# Altium PCB PLCC-RP2350B_ORIGINALPINNING.PcbDoc
Units mm, origin at the board's own origin, x right, y up, seen from the top; angles counter-clockwise.
Board outline 27.94 x 27.94 mm, 4 copper layers (Top Layer, Layer 1, Layer 2, Bottom Layer), stack 0.603 mm thick; 61 components, 74 nets, 351 pads, 94 vias.
Unrouted connection lines stored in the file: 52.
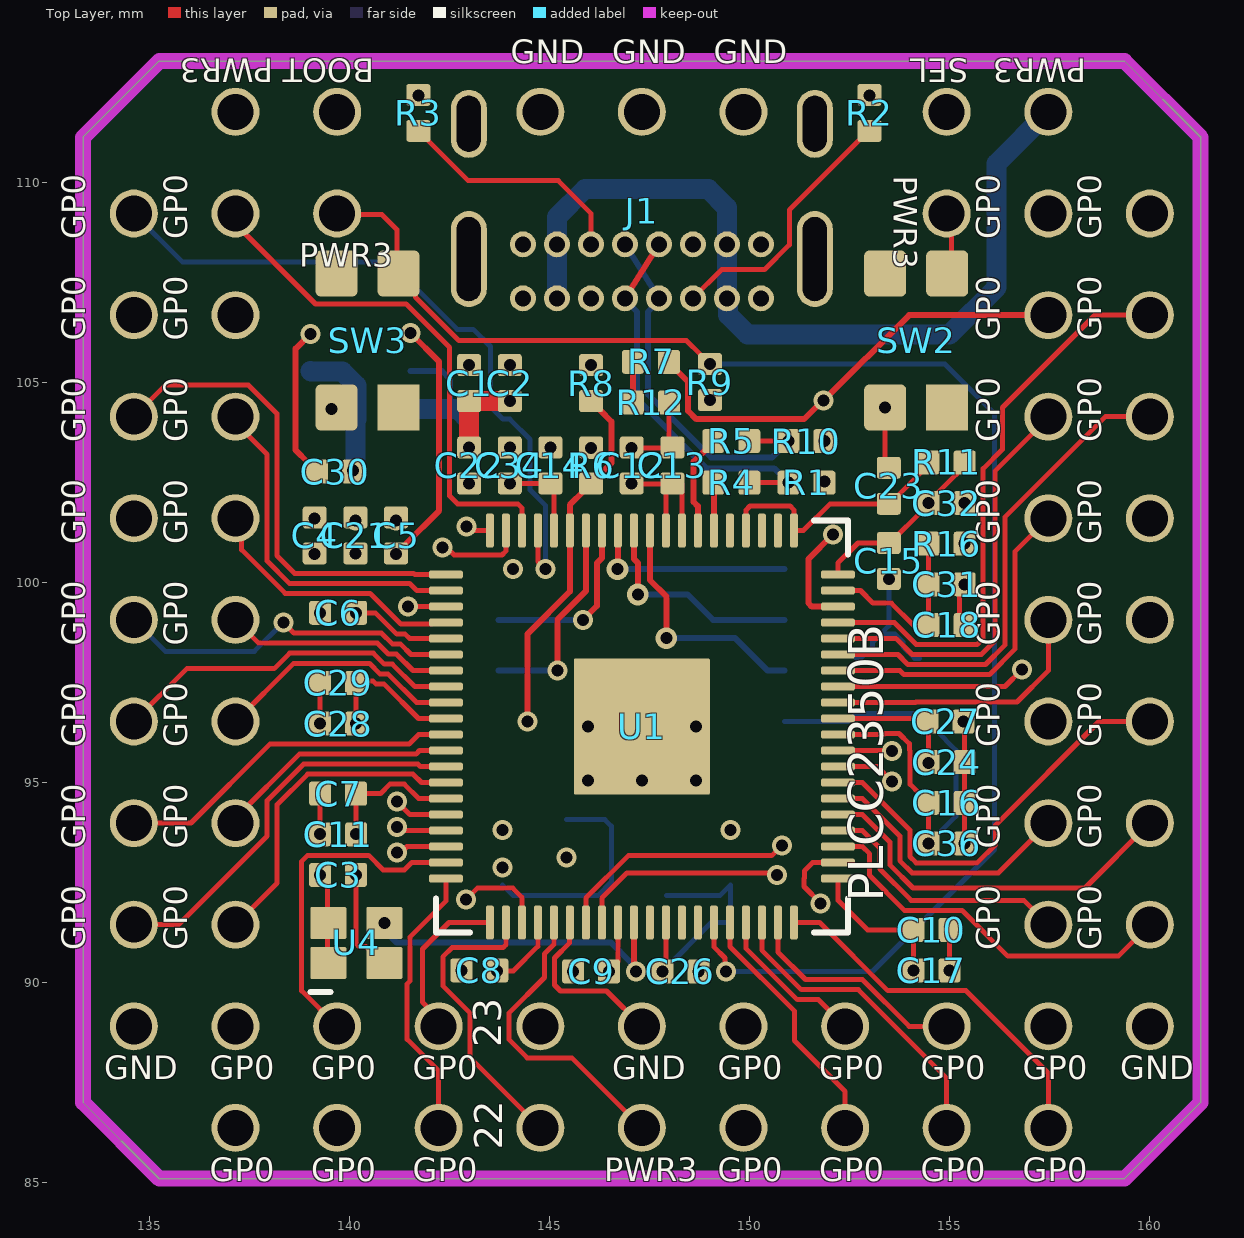
[diagram p0: Top Layer view]
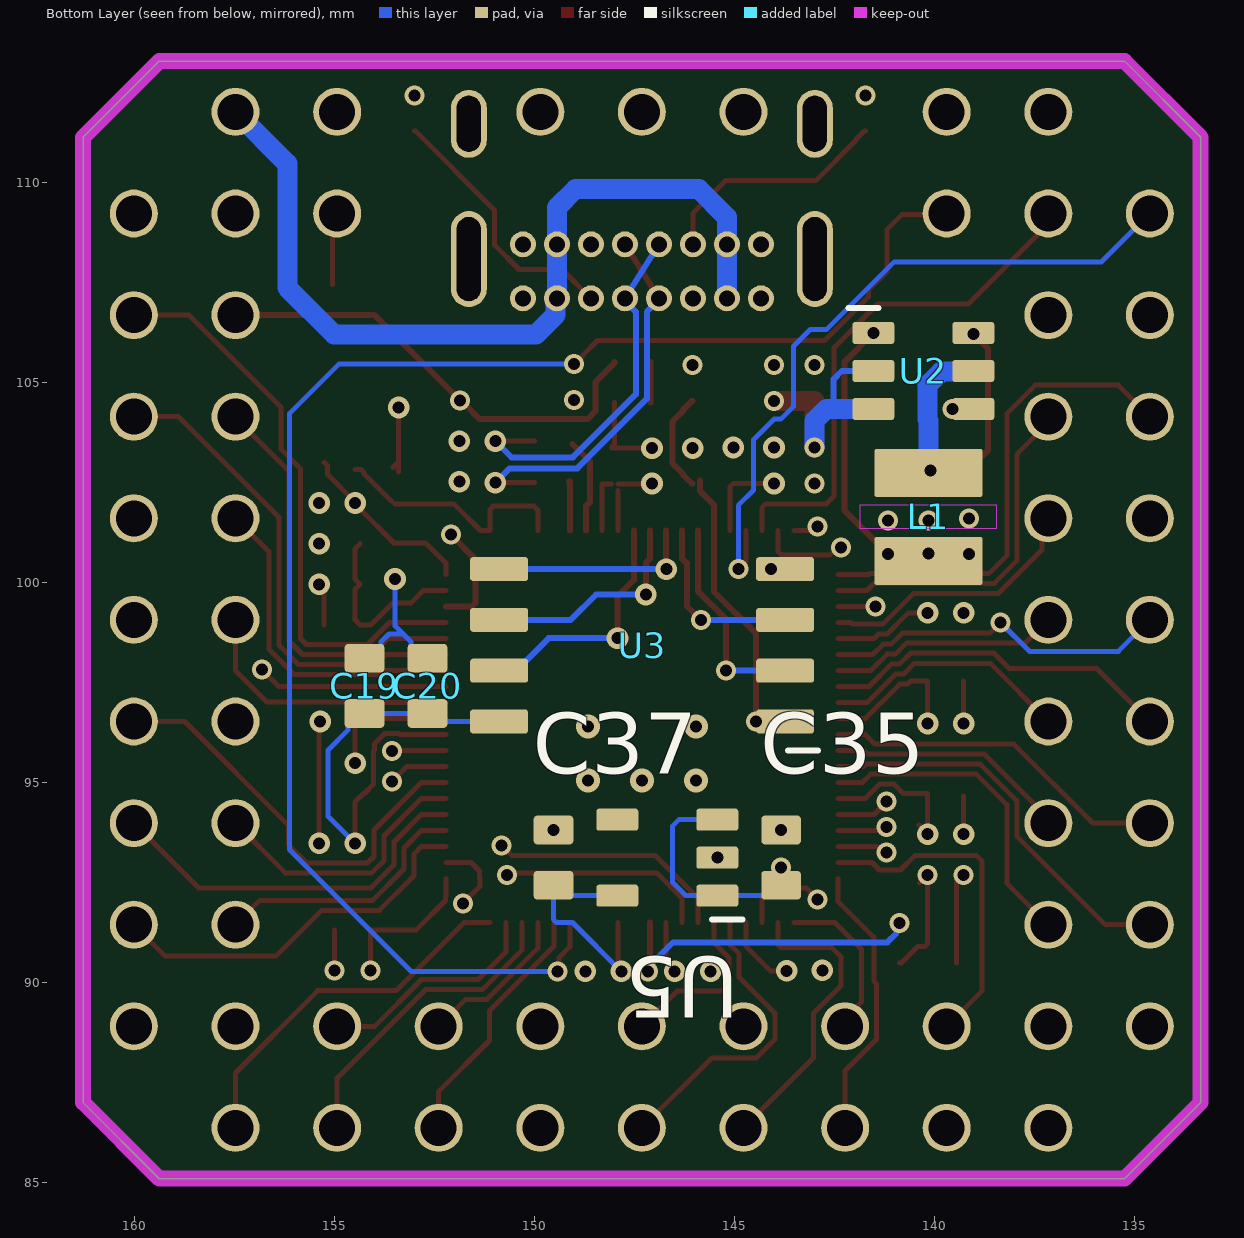
[diagram p1: Bottom Layer view, seen from below]
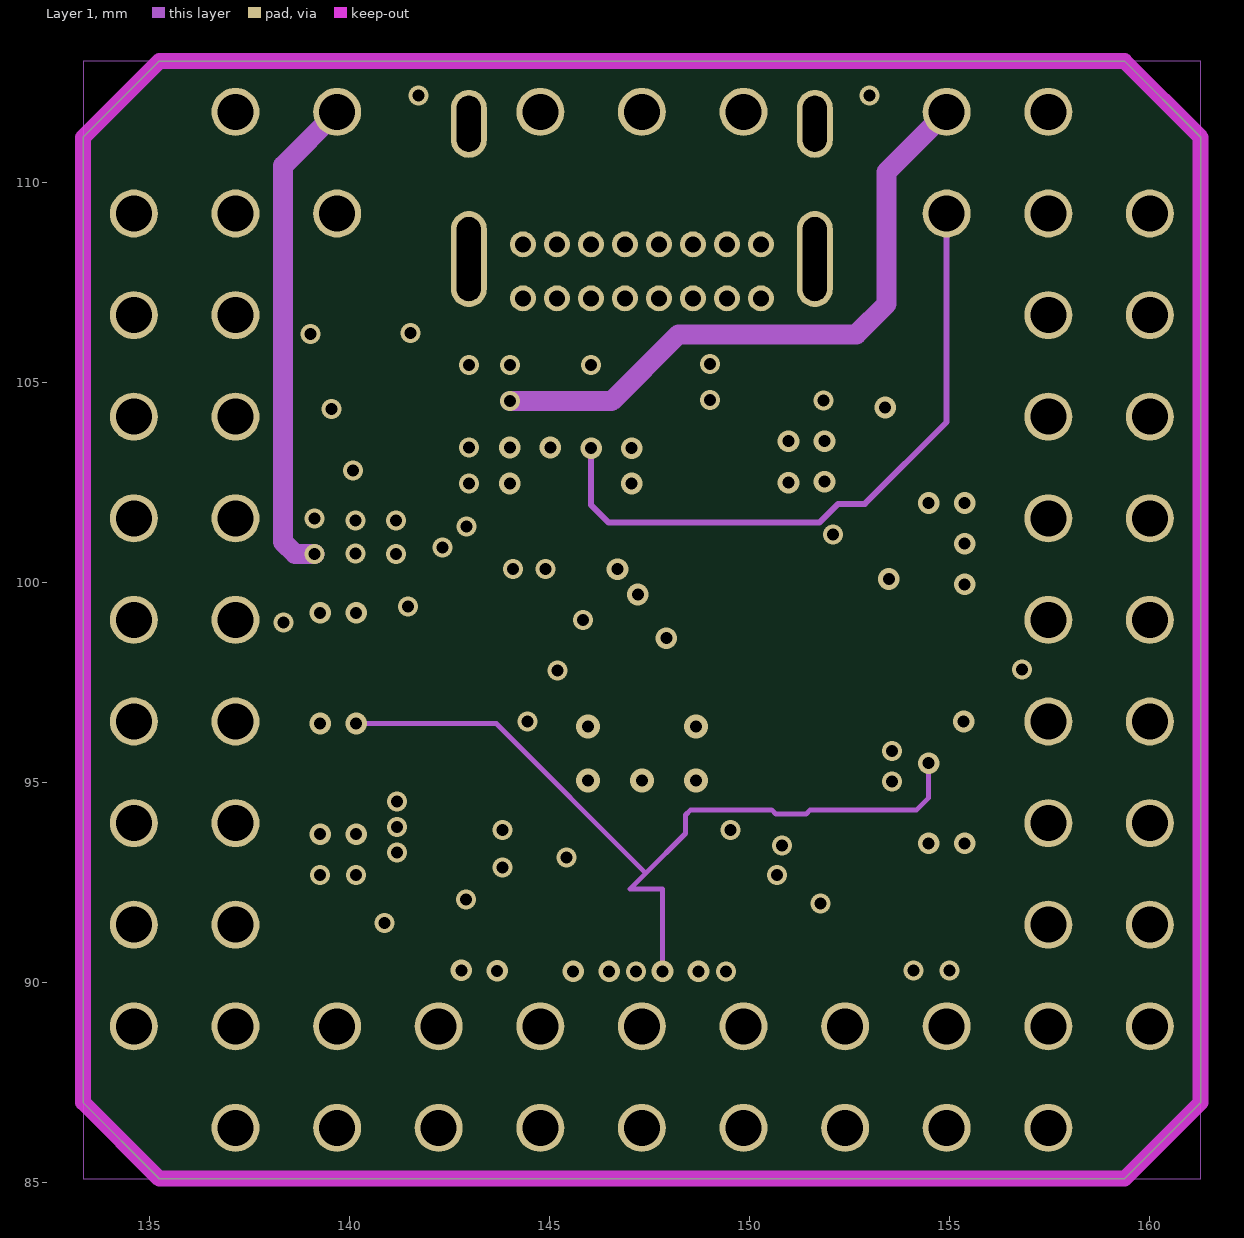
[diagram p2: Layer 1]
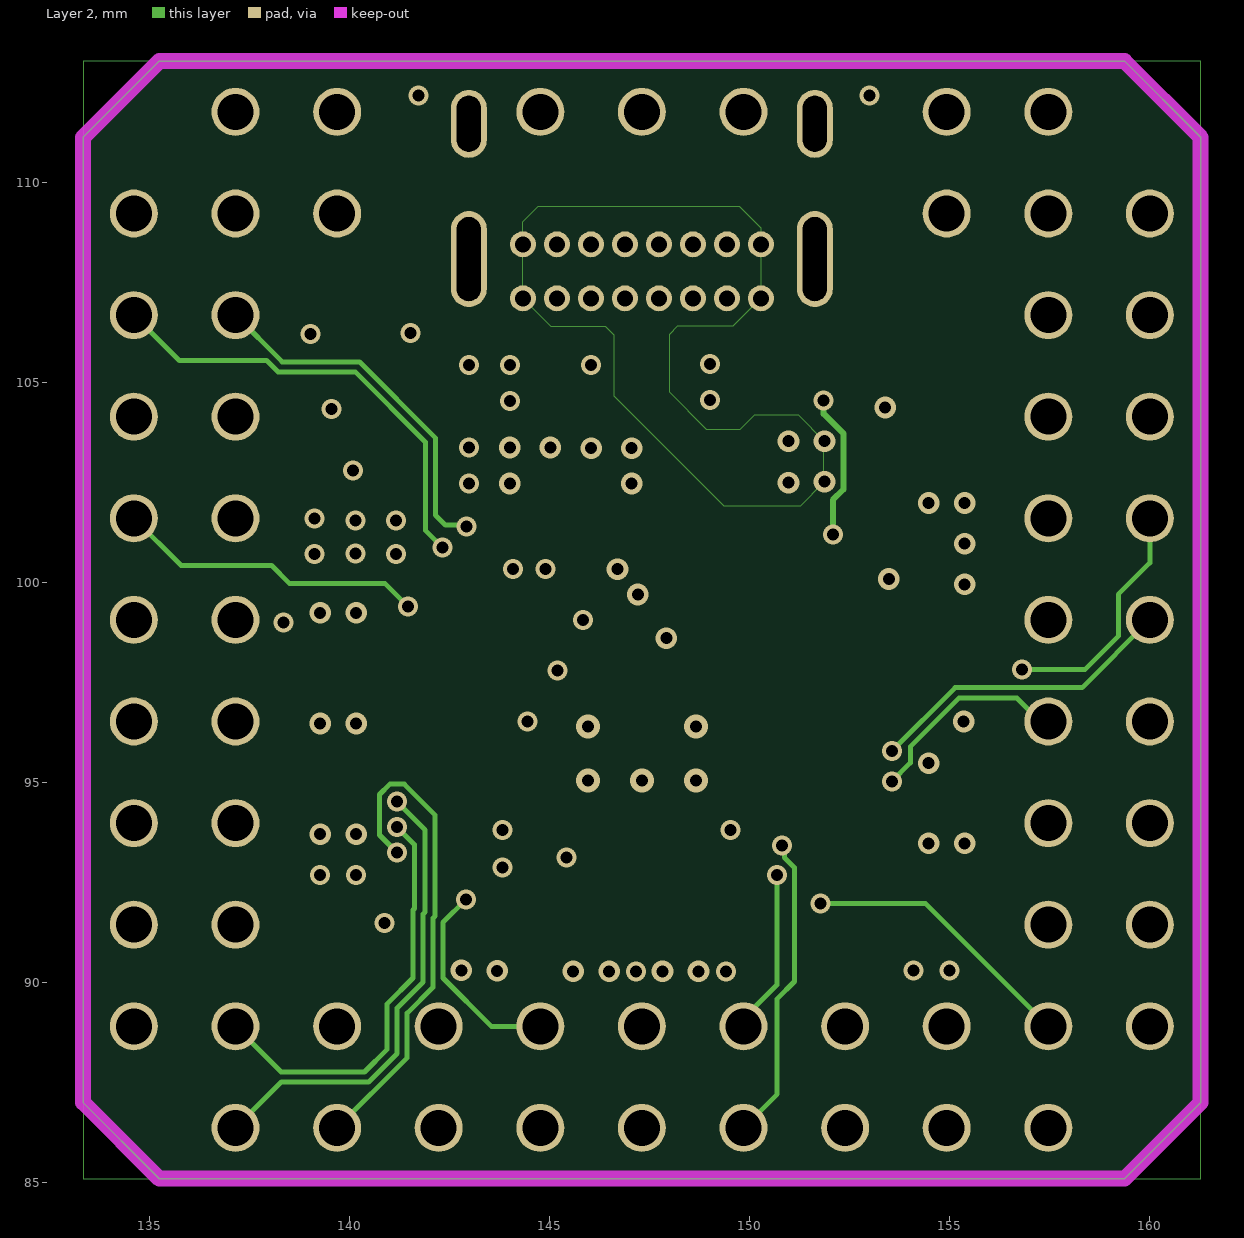
[diagram p3: Layer 2]
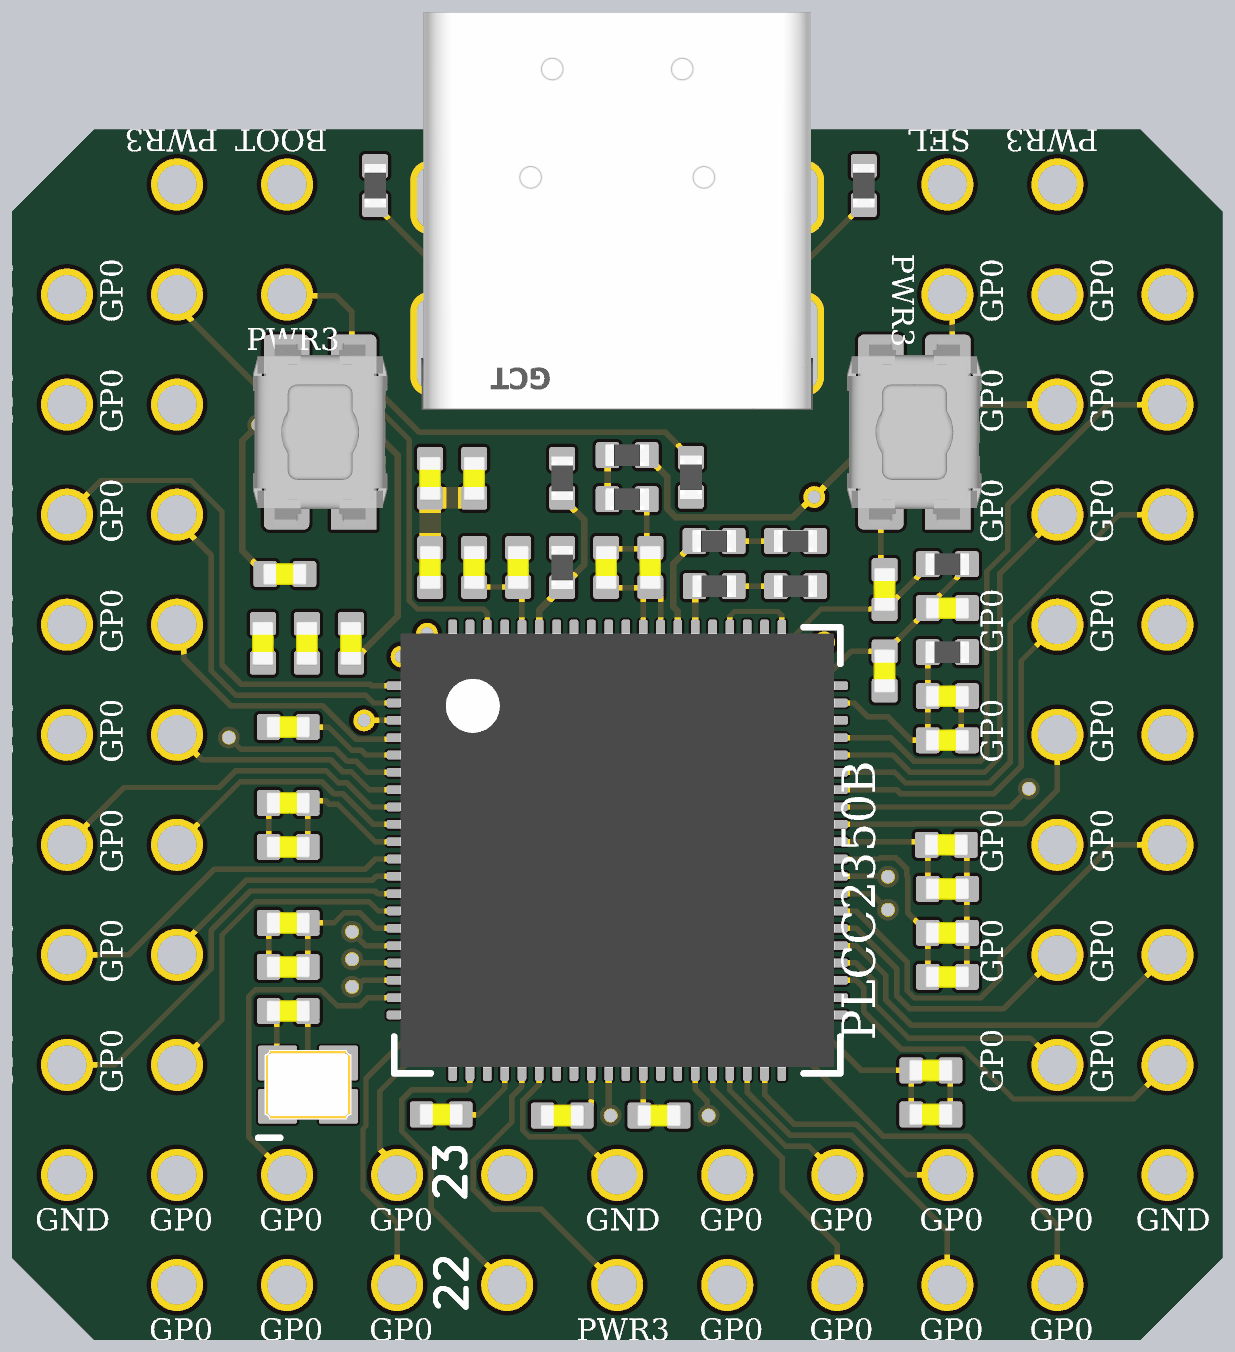
[diagram p4: 3D render of the assembled board from above, using the file's embedded part models]
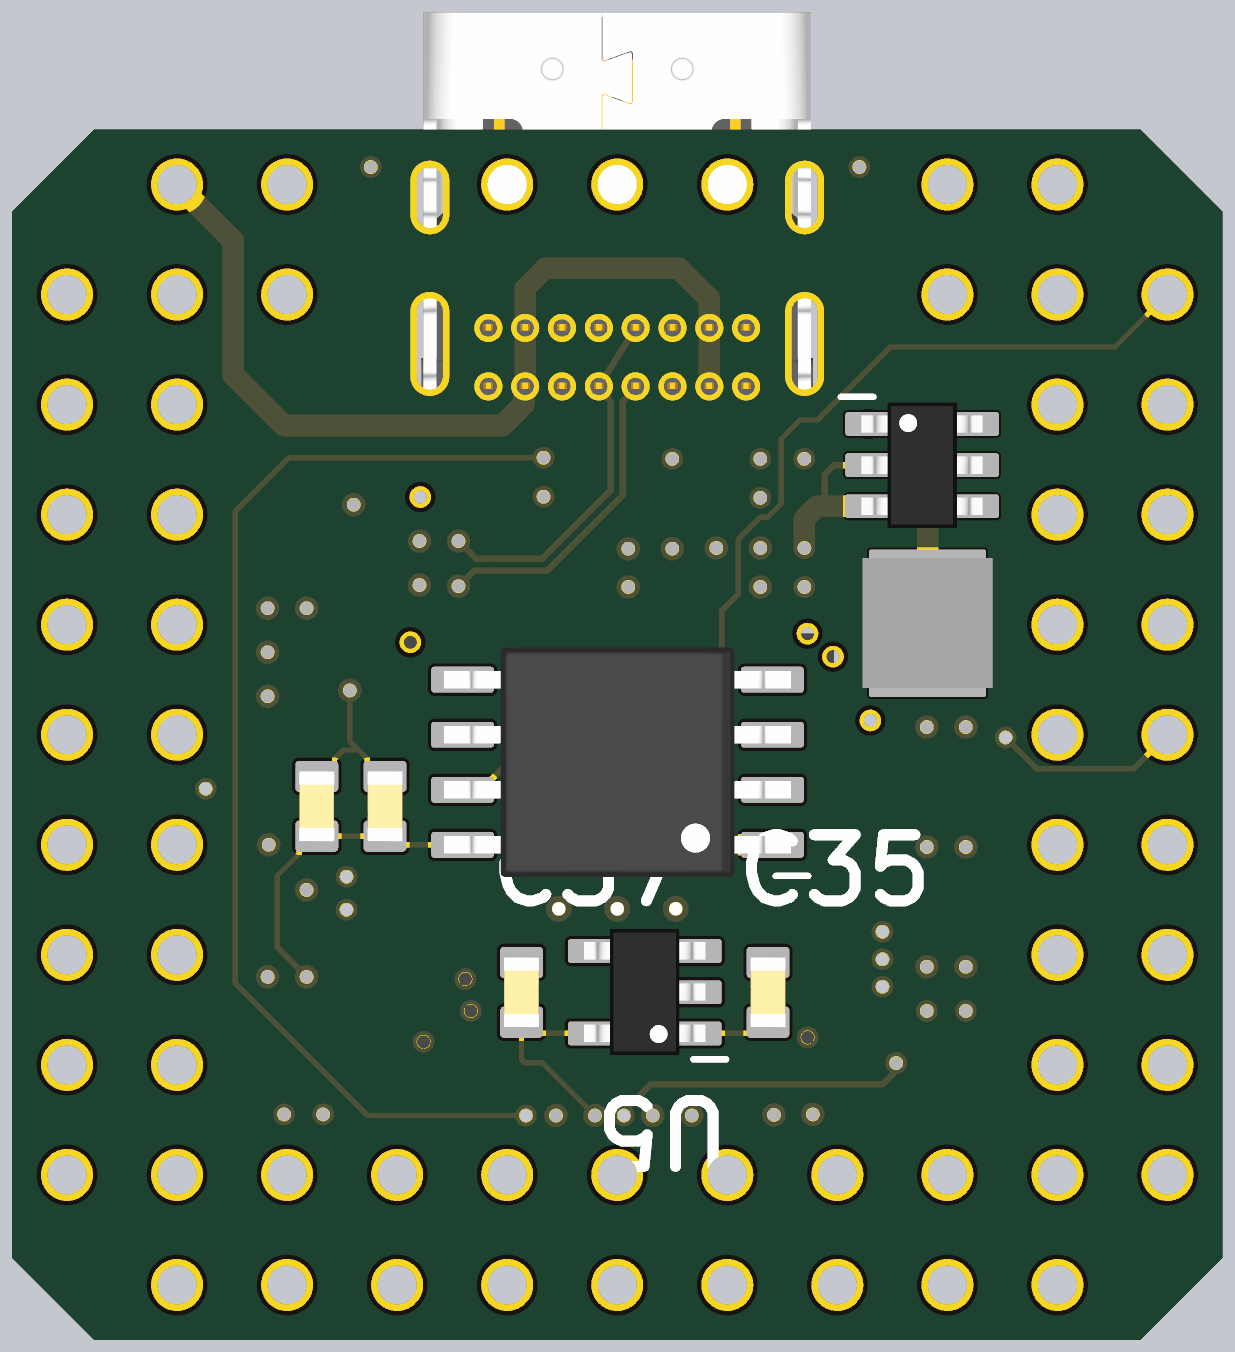
[diagram p5: 3D render of the assembled board from below, using the file's embedded part models]

## Layer stack, top to bottom
Top Solder: solder mask 0.0102, Solder Resist, Dk 3.5
Top Layer: signal copper 0.0356
Dielectric 2: prepreg 0.0711, PP-006, Dk 4.1
Layer 1: signal copper 0.035
Dielectric 1: dielectric 0.32, FR-4, Dk 4.8
Layer 2: signal copper 0.035
Dielectric 3: prepreg 0.0711, PP-006, Dk 4.1
Bottom Layer: signal copper 0.0356
Bottom Solder: solder mask 0.0102, Solder Resist, Dk 3.5

## Board outline
133.35,86.995 135.255,85.09 159.385,85.09 161.29,86.995 161.29,111.125 159.385,113.03 135.255,113.03 133.35,111.125

## Design rules (kind name [scope] priority, off if disabled: settings)
Clearance [All] p1: gap=0.125 ignorepadtopadclearanceinfootprint=FALSE
ComponentClearance [All] p1: gap=0.01 collisioncheckmode=3 verticalgap=0.254 showdistances=FALSE checkcomponentboundary=TRUE
Length "Schematic Length Constraint" [InNetClass('QSPI')] p1: maxlimit=2540 minlimit=0 usedelayunits=TRUE mindelay=0.000000 maxdelay=500.000000
MatchedLengths "Schematic Matched Net Lengths" [InNetClass('QSPI')] p1: tolerance=2 checknetsindiffpair=FALSE checkdiffpairvsdiffpair=TRUE checkxsignals=TRUE checkothers=TRUE usedelayunits=TRUE delaytolerance=50.000000
PolygonConnect [All] p1: thpad.connectstyle=Direct thpad.reliefconductorwidth=0.254 thpad.reliefentries=4 thpad.polygonreliefangle="90 Angle" thpad.airgapwidth=0.254 smdpad.connectstyle=Relief smdpad.reliefconductorwidth=0.254 smdpad.reliefentries=4 smdpad.polygonreliefangle="90 Angle" smdpad.airgapwidth=0.254 via.connectstyle=Direct via.reliefconductorwidth=0.254 via.reliefentries=4 via.polygonreliefangle="90 Angle" via.airgapwidth=0.254
RoutingVias [All] p1: holewidth=0.3 width=0.5 viastyle="Through Hole" minholewidth=0.3 minwidth=0.45 maxholewidth=0.8 maxwidth=1
SolderMaskExpansion [All] p1: expansion=0.102 istentingtop=FALSE
SupplyNets "Schematic Supply Nets_1" [InNet('VSYS')] p1: voltage=0.000
SupplyNets "Schematic Supply Nets_9" [InNet('VREF')] p2: voltage=0.000
SupplyNets "Schematic Supply Nets_8" [InNet('P3V3OUT')] p3: voltage=0.000
SupplyNets "Schematic Supply Nets_7" [InNet('GND')] p4: voltage=0.000
SupplyNets "Schematic Supply Nets_6" [InNet('RST')] p5: voltage=0.000
SupplyNets "Schematic Supply Nets_4" [InNet('VBUS')] p6: voltage=0.000
SupplyNets "Schematic Supply Nets_3" [InNet('P3V3')] p7: voltage=0.000
SupplyNets "Schematic Supply Nets" [InNet('BOOT')] p8: voltage=0.000
Width [All] p1: maxlimit=2 minlimit=0.125 preferedwidth=0.15
29 further rules are at their usual default settings.

## Classes and differential pairs
net class QSPI: QCLK QSD0 QSD1 QSD2 QSD3 QSS

## Components (designator, comment, footprint, x,y, rotation, side; value= is the part's Value field where it differs from the comment)
C1 "CAP0402" CAPC0402 143.002,104.978 r90 top
C2 "CAP0402" CAPC0402 144.018,104.978 r90 top
C3 "CAP0402" CAPC0402 139.725,92.685 r0 top
C4 "CAP0402" CAPC0402 139.141,101.171 r90 top locked
C5 "CAP0402" CAPC0402 141.173,101.171 r90 top locked
C6 "CAP0402" CAPC0402 139.725,99.238 r180 top
C7 "CAP0402" CAPC0402 139.725,94.717 r180 top
C8 "CAP0402" CAPC0402 143.256,90.297 r180 top
C9 "CAP0402" CAPC0402 146.05,90.272 r180 top locked
C10 "CAP0402" CAPC0402 154.559,91.313 r0 top
C11 "CAP0402" CAPC0402 139.725,93.701 r180 top
C12 "CAP0402" CAPC0402 147.066,102.921 r90 top
C13 "CAP0402" CAPC0402 148.082,102.921 r90 top
C14 "CAP0402" CAPC0402 145.034,102.921 r90 top
C15 "CAP0402" CAPC0402 153.492,100.533 r270 top locked
C16 "CAP0402" CAPC0402 154.94,94.488 r0 top
C17 "CAP0402" CAPC0402 154.559,90.297 r0 top
C18 "CAP0402" CAPC0402 154.94,98.933 r0 top locked
C19 "CAP0603" CAPC0603 154.254,97.409 r90 bottom
C20 "CAP0603" CAPC0603 152.679,97.409 r90 bottom
C21 "CAP0402" CAPC0402 140.157,101.171 r90 top locked
C22 "CAP0402" CAPC0402 143.002,102.921 r270 top
C23 "CAP0402" CAPC0402 153.492,102.413 r90 top locked
C24 "CAP0402" CAPC0402 154.94,95.504 r0 top
C26 "CAP0402" CAPC0402 148.285,90.272 r0 top
C27 "CAP0402" CAPC0402 154.915,96.52 r0 top
C28 "CAP0402" CAPC0402 139.725,96.469 r180 top
C29 "CAP0402" CAPC0402 139.725,97.485 r180 top locked
C30 "CAP0402" CAPC0402 139.649,102.768 r180 top
C31 "CAP0402" CAPC0402 154.94,99.949 r0 top locked
C32 "CAP0402" CAPC0402 154.94,101.981 r0 top locked
C34 "CAP0402" CAPC0402 144.018,102.921 r90 top
C35 "CAP0603" CAPC0603 143.84,93.116 r90 bottom
C36 "CAP0402" CAPC0402 154.94,93.472 r0 top
C37 "CAP0603" CAPC0603 149.53,93.116 r90 bottom
D2 "BLUE" LED-0603-BLUE 166.573,87.122 r0 top
J1 "CONN-USBC-USB2-HOR" CONN-GCT-USB4085 147.32,111.125 r180 top locked
J2 "PLCC2350B" PLCC2350B 184.582,100 r0 top
L1 "4.7uH" IND-ABRACON-ASPI-3012S-3R9N-T 140.157,101.635 r270 bottom locked value=4u7H
LOGO1 "LOGO-LICENSE-CC0-PUBLIC" LOGO-LICENSE-CC0-PUBLIC 177.948,131.953 r270 top
LOGO2 "LOGO-LICENSE-CC" LOGO-LICENSE-CC 167.081,127.991 r270 top
R1 "RESC0402" RESC0402 151.435,102.489 r0 top locked value=27R
R2 "RESC0402" RESC0402 153.01,111.735 r90 top value=5K1
R3 "RESC0402" RESC0402 141.732,111.735 r90 top value=5K1
R4 "RESC0402" RESC0402 149.558,102.489 r180 top value=27R
R5 "RESC0402" RESC0402 149.555,103.53 r180 top locked value=27R
R6 "RESC0402" RESC0402 146.05,102.921 r270 top value=1K
R7 "RESC0402" RESC0402 147.549,105.512 r180 top value=1K
R8 "RESC0402" RESC0402 146.05,104.978 r90 top value=10K
R9 "RESC0402" RESC0402 149.022,105.004 r270 top value=10K
R10 "RESC0402" RESC0402 151.435,103.53 r0 top locked value=27R
R11 "RESC0402" RESC0402 154.94,102.997 r180 top locked value=33R
R12 "RESC0402" RESC0402 147.549,104.496 r0 top value=1K
R16 "RESC0402" RESC0402 154.94,100.965 r0 top locked value=33R
SW2 "SWITCH-PANASONIC-EVP-AA202K" SWITCH-PANASONIC-EVP-AA202K 154.178,106.045 r90 top locked
SW3 "SWITCH-PANASONIC-EVP-AA202K" SWITCH-PANASONIC-EVP-AA202K 140.462,106.045 r90 top locked
U1 "IC-RP2350-DIP64" QFN40P1000X1000X90_HS-81N 147.32,96.393 r0 top locked
U2 "AP63203Q" SOT23-6 140.284,105.283 r180 bottom
U3 "W25Q128JVSIQ" SO127P790-8N 147.314,98.425 r0 bottom locked
U4 "XTAL-OSC" XOSC-SCTF-SX1M12.000M10F30TNN 140.183,90.983 r0 top
U5 "IC-TI-TLV74311" SOT23-5 146.685,93.116 r0 bottom

## Footprints (in the part's own frame and the unit in brackets; to place one, negate y for a bottom-side part, rotate by r counter-clockwise, add the part's x,y. Pads: shape width x height; smd on the part's side, far side on the other; paste and mask are expansions set on the pad)
CAPC0402 [mm] "CAPACITOR, CHIP 0402 (1005) 0.5MM THICK"
  rrect25% 0.55x0.6 smd paste+0 mask+0.075: 1(-0.45,0) 2(0.45,0)
  body extent -0.51,-0.25 0.51,0.26, height 0.52
CAPC0603 [mm] "CAPACITOR, CHIP 0603 (1608) 0.5MM THICK"
  rrect25% 0.72x0.99 smd paste+0 mask+0.075: 1(-0.69,0) 2(0.69,0)
  body extent -0.81,-0.41 0.81,0.41, height 0.51
CONN-GCT-USB4085 [mm]
  rrect100% 0.9x2.4 hole 2.1 slot 0.6 at 0 deg paste-2539.97 mask+0: 1(-4.325,3.045) 2(4.325,3.045)
  rrect100% 0.9x1.7 hole 1.4 slot 0.6 at 0 deg paste-2539.97 mask+0: 3(-4.325,-0.335) 4(4.325,-0.335)
  round 0.65 hole 0.4 paste-2539.97 mask+0: A1(-2.975,4.025) A4(-2.125,4.025) A5(-1.275,4.025) A6(-0.425,4.025) A7(0.425,4.025) A8(1.275,4.025) A9(2.125,4.025) A12(2.975,4.025) B1(2.975,2.675) B4(2.125,2.675) B5(1.275,2.675) B6(0.425,2.675) B7(-0.425,2.675) B8(-1.275,2.675) B9(-2.125,2.675) B12(-2.975,2.675)
  body extent -4.87,-4.83 4.87,4.83, height 0.25
IND-ABRACON-ASPI-3012S-3R9N-T [mm]
  rrect8% 1.2x2.7 smd mask+0.05: 1(-1.1,0) 2(1.1,0)
  Top Layer keep-out region: -0.3,1.7 0.3,1.7 0.3,-1.7 -0.3,-1.7
  body extent -1.5,-1.5 1.5,1.5, height 1.51
LED-0603-BLUE [mm]
  rrect12% 0.8x0.8 smd paste+0 mask+0.05: 1(0.75,0) 2(-0.75,0)
  silkscreen extent 1.4,-0.4 1.4,0.4, body extent -0.8,-0.4 0.8,0.4, height 0.9
LOGO-LICENSE-CC [mm]
  silkscreen extent -2.08,-2.05 2.03,2.05
LOGO-LICENSE-CC0-PUBLIC [mm]
  silkscreen extent -1.97,-1.97 10.7,1.97
PLCC2350B [mm]
  round 1.2 hole 0.9: 1(0,-12.7) 2(0,-10.16) 3(2.54,-12.7) 4(2.54,-10.16) 5(5.08,-12.7) 6(5.08,-10.16) 7(7.62,-12.7) 8(7.62,-10.16) 9(10.16,-12.7) 10(12.7,-10.16) 11(10.16,-10.16) 12(12.7,-7.62) 13(10.16,-7.62) 14(12.7,-5.08) 15(10.16,-5.08) 16(12.7,-2.54) 17(10.16,-2.54) 18(12.7,0) 19(10.16,0) 20(12.7,2.54) 21(10.16,2.54) 22(12.7,5.08) 23(10.16,5.08) 24(12.7,7.62) 25(10.16,7.62) 26(12.7,10.16) 27(10.16,12.7) 28(10.16,10.16) 29(7.62,12.7) 30(7.62,10.16) 41(-7.62,12.7) 42(-7.62,10.16) 43(-10.16,12.7) 44(-12.7,10.16) 45(-10.16,10.16) 46(-12.7,7.62) 47(-10.16,7.62) 48(-12.7,5.08) 49(-10.16,5.08) 50(-12.7,2.54) 51(-10.16,2.54) 52(-12.7,0) 53(-10.16,0) 54(-10.16,-2.54) 55(-12.7,-2.54) 56(-12.7,-5.08) 57(-10.16,-5.08) 58(-12.7,-7.62) 59(-10.16,-7.62) 60(-12.7,-10.16) 61(-10.16,-12.7) 62(-10.16,-10.16) 63(-7.62,-12.7) 64(-7.62,-10.16) 65(-5.08,-12.7) 66(-5.08,-10.16) 67(-2.54,-12.7) 68(-2.54,-10.16)
QFN40P1000X1000X90_HS-81N [mm] "QFN, 80-Leads, Body 10.00x10.00mm, Pitch 0.40mm, Thermal Pad 3.40x3.40mm, IPC Medium Density"
  rrect50% 0.85x0.2 smd mask+0.05: 1(-4.9,3.8) 2(-4.9,3.4) 3(-4.9,3) 4(-4.9,2.6) 5(-4.9,2.2) 6(-4.9,1.8) 7(-4.9,1.4) 8(-4.9,1) 9(-4.9,0.6) 10(-4.9,0.2) 11(-4.9,-0.2) 12(-4.9,-0.6) 13(-4.9,-1) 14(-4.9,-1.4) 15(-4.9,-1.8) 16(-4.9,-2.2) 17(-4.9,-2.6) 18(-4.9,-3) 19(-4.9,-3.4) 20(-4.9,-3.8) 41(4.9,-3.8) 42(4.9,-3.4) 43(4.9,-3) 44(4.9,-2.6) 45(4.9,-2.2) 46(4.9,-1.8) 47(4.9,-1.4) 48(4.9,-1) 49(4.9,-0.6) 50(4.9,-0.2) 51(4.9,0.2) 52(4.9,0.6) 53(4.9,1) 54(4.9,1.4) 55(4.9,1.8) 56(4.9,2.2) 57(4.9,2.6) 58(4.9,3) 59(4.9,3.4) 60(4.9,3.8)
  rrect50% 0.2x0.85 smd mask+0.05: 21(-3.8,-4.9) 22(-3.4,-4.9) 23(-3,-4.9) 24(-2.6,-4.9) 25(-2.2,-4.9) 26(-1.8,-4.9) 27(-1.4,-4.9) 28(-1,-4.9) 29(-0.6,-4.9) 30(-0.2,-4.9) 31(0.2,-4.9) 32(0.6,-4.9) 33(1,-4.9) 34(1.4,-4.9) 35(1.8,-4.9) 36(2.2,-4.9) 37(2.6,-4.9) 38(3,-4.9) 39(3.4,-4.9) 40(3.8,-4.9) 61(3.8,4.9) 62(3.4,4.9) 63(3,4.9) 64(2.6,4.9) 65(2.2,4.9) 66(1.8,4.9) 67(1.4,4.9) 68(1,4.9) 69(0.6,4.9) 70(0.2,4.9) 71(-0.2,4.9) 72(-0.6,4.9) 73(-1,4.9) 74(-1.4,4.9) 75(-1.8,4.9) 76(-2.2,4.9) 77(-2.6,4.9) 78(-3,4.9) 79(-3.4,4.9) 80(-3.8,4.9)
  rrect2% 3.4x3.4 smd paste-5 mask+0.05: 81(0,0)
  silkscreen extent -5.15,-5.15 5.15,5.15, body extent -5.01,-5.01 5.01,5.01, height 0.9
RESC0402 [mm] "RESISTOR, CHIP 0402 (1005)"
  rrect25% 0.55x0.6 smd paste+0 mask+0.075: 1(-0.45,0) 2(0.45,0)
  body extent -0.5,-0.25 0.5,0.25, height 0.27
SO127P790-8N [mm] "SO8"
  rrect25% 1.45x0.6 smd mask+0.075: 1(-3.575,1.905) 2(-3.575,0.635) 3(-3.575,-0.635) 4(-3.575,-1.905) 5(3.575,-1.905) 6(3.575,-0.635) 7(3.575,0.635) 8(3.575,1.905)
  silkscreen extent -4.4,2.62 -3.65,2.63, body extent -4,-2.65 4,2.65, height 2.16
SOT23-5 [mm] "SOT23 PACKAGE, 5 PIN (SOT25)"
  rrect25% 1.05x0.55 smd paste+0 mask+0.075: 1(-1.25,0.95) 2(-1.25,0) 3(-1.25,-0.95) 4(1.25,-0.95) 5(1.25,0.95)
  silkscreen extent -1.87,1.55 -1.12,1.55, body extent -1.4,-1.46 1.4,1.44, height 1.45
SOT23-6 [mm] "SOT23 PACKAGE, 6 PIN (SOT26)"
  rrect25% 1.05x0.55 smd paste+0 mask+0.05: 1(-1.25,0.95) 2(-1.25,0) 3(-1.25,-0.95) 4(1.25,-0.95) 5(1.25,0) 6(1.25,0.95)
  silkscreen extent -1.88,1.58 -1.12,1.58, body extent -1.4,-1.45 1.4,1.45, height 1.45
SWITCH-PANASONIC-EVP-AA202K [mm] "SWITCH-PANASONIC-EVP-AA202K"
  rect 1.15x1.05 smd mask+0.075: 1(-1.675,-0.775)
  rrect25% 1.15x1.05 smd mask+0.075: 2(1.675,-0.775) 3(1.675,0.775) 4(-1.675,0.775)
  body extent -2.15,-1.55 2.15,1.55, height 1.71
XOSC-SCTF-SX1M12.000M10F30TNN [mm]
  rrect10% 0.9x0.8 smd paste+0 mask+0.05: 1(-0.7,-0.5) 2(0.7,-0.5) 3(0.7,0.5) 4(-0.7,0.5)
  silkscreen extent -1.15,-1.22 -0.64,-1.22, body extent -1,-0.8 1,0.8, height 0.76

## Part data
C1 C2 C4 C5 C21 C22: library part CAPC-0402-22uF-10V-X5R, "CAPACITOR,CERAMIC,22uF,10V,X5R,0402", Capacitance=22uF, Dielectric=X5R, LCSC=C6119813, Manufacturer 1=SAMSUNG, Package / Case=0402, Supplier Part Number 1=1276-1482-1-ND, Voltage=10V, Supplier 1=Digikey
C3 C6 C7 C8 C9 C10 C13 C14 C15 C16 C18 C27 C28 C30: library part CAPC-0402-100nF-16V-X7R, "CAPACITOR,CERAMIC,100nF,16V,X7R,0402", Capacitance=100nF, Dielectric=X7R, LCSC=C60474, Package / Case=0402, Supplier Part Number 1=1292-1630-1-ND, Voltage=16V, Supplier 1=Digikey
C11 C12 C17 C23 C24 C26 C29 C31 C32 C34 C36: library part CAPC-0402-4u7-10V-X5R, "CAPACITOR,CERAMIC,4u7,10V,X5R,0402", Capacitance=4u7, Dielectric=X5R, LCSC=C1705, Package / Case=0603, Supplier Part Number 1=1276-1482-1-ND, Voltage=10V, Supplier 1=Digikey
C19: library part CAPC-0603-4u7-10V-X5R, "CAPACITOR,CERAMIC,4u7,10V,X5R,0603", Capacitance=4u7, Dielectric=X5R, LCSC=C1705, Manufacturer 1=SAMSUNG, Manufacturer Part Number 1=CL10A475KP8NNNC, Package / Case=0603, Supplier Part Number 1=GRM188Z71A475KE15J, Voltage=10V, MOUSER=187-CL10A475KP8NNNC, Supplier 1="Arrow Electronics"
C20: library part CAPC-0603-100nF-50V-X7R, "CAPACITOR,CERAMIC,100nF,50V,X7R,0603", Capacitance=100nF, Dielectric=X7R, LCSC=C14663, Manufacturer 1=KEMET, Manufacturer Part Number 1=C0603C104K5RACTU, Package / Case=0603, Voltage=50V, MOUSER=80-C0603C104K5R
C35 C37: library part CAPC-0603-22uF-16V-X5R, "CAPACITOR,CERAMIC,22uF,16V,X5R,0603", Capacitance=22uF, Dielectric=X5R, LCSC=C2762594, Manufacturer 1=SAMSUNG, Manufacturer Part Number 1=CL10A226MO7JZNC, Package / Case=0603, Supplier Part Number 1=1276-7076-1-ND, Voltage=16V, MOUSER=187-CL10A226MO7JZNC, Supplier 1=Digikey
D2: library part LED-WURTH-150060BS75000, "LED,BLUE,0603", LCSC=C965807, Supplier Part Number 1=732-4966-1-ND, Supplier 1=Digikey
J1: "CONN,USB-C,16P,RA,TH,8.94X9.17", LCSC=C36936564, Supplier Part Number 1=2073-USB4085-GF-ACT-ND, Supplier 1=Digikey
L1: library part IND-TAIYO-NRH3012T4R7MN, "IND,4.7uH,1.06A,3X3, NRH3012T4R7MN", LCSC=C5159666, Supplier Part Number 1=587-2591-1-ND, Supplier 1=Digikey
R1 R4 R5 R10: library part RESC-0402-27R-1%-1/10W, "RESISTOR,27R,1%,63mW,0402 (1005)", LCSC=C138021, Power=1/16W, Supplier Part Number 1=2577120, Tolerance=1%, Supplier 1="Future Electronics"
R2 R3: library part RESC-0402-5K1-1%-1/10W, "RESISTOR,5K1,1%,63mW,0402 (1005)", LCSC=C105872, Power=1/16W, Supplier Part Number 1=6053649, Tolerance=1%, Supplier 1="Future Electronics"
R6 R7 R12: library part RESC-0402-1K-1%-1/10W, "RESISTOR,1K,1%,63mW,0402 (1005)", LCSC=C106235, Power=1/16W, Supplier Part Number 1=7825607, Tolerance=1%, Supplier 1="Future Electronics"
R8 R9: library part RESC-0402-10K-1%-1/10W, "RESISTOR,10K,1%,63mW,0402 (1005)", LCSC=C60490, Power=1/16W, Supplier Part Number 1=3388022, Tolerance=1%, Supplier 1="Future Electronics"
R11 R16: library part RESC-0402-33R-1%-1/10W, "RESISTOR,33R,1%,63mW,0402 (1005)", LCSC=C138002, Power=1/16W, Supplier Part Number 1=8177883, Tolerance=1%, Supplier 1="Future Electronics"
SW2 SW3: "SW,SMD,TACT,4PIN,2.9X3.5,4PIN", LCSC=C483888, Supplier Part Number 1=667-EVP-AA202K, Supplier 1=Mouser
U1: "IC,CPU,RP2350B,QFN80", LCSC=C42415655
U2: library part IC-DIODES-AP63203Q, "IC,PMIC,STEP-DOWN, 2A 3.3V", LCSC=C780769, Supplier Part Number 1=31-AP63203QWU-7CT-ND, Supplier 1=Digikey
U3: library part IC-WINBOND-W25Q128JVSIQ, "IC,FLASH,QSPI,16Mx8", LCSC=C97521, Supplier Part Number 1=W25Q128JVSIQCT-ND, Supplier 1=Digikey

## Free pads (board coordinates)
  round 1.2 hole 0.9: 1(147.32,86.36) 2(147.32,88.9) 3(149.86,86.36) 4(149.86,88.9) 5(152.4,86.36) 6(152.4,88.9) 7(154.94,86.36) 8(154.94,88.9) 9(157.48,86.36) 10(160.02,88.9) 11(157.48,88.9) 12(160.02,91.44) 13(157.48,91.44) 14(160.02,93.98) 15(157.48,93.98) 16(160.02,96.52) 17(157.48,96.52) 18(160.02,99.06) 19(157.48,99.06) 20(160.02,101.6) 21(157.48,101.6) 22(160.02,104.14) 23(157.48,104.14) 24(160.02,106.68) 25(157.48,106.68) 26(160.02,109.22) 27(157.48,111.76) 28(157.48,109.22) 29(154.94,111.76) 30(154.94,109.22) 33(149.86,111.76) 35(147.32,111.76) 37(144.78,111.76) 41(139.7,111.76) 42(139.7,109.22) 43(137.16,111.76) 44(134.62,109.22) 45(137.16,109.22) 46(134.62,106.68) 47(137.16,106.68) 48(134.62,104.14) 49(137.16,104.14) 50(134.62,101.6) 51(137.16,101.6) 52(134.62,99.06) 53(137.16,99.06) 54(137.16,96.52) 55(134.62,96.52) 56(134.62,93.98) 57(137.16,93.98) 58(134.62,91.44) 59(137.16,91.44) 60(134.62,88.9) 61(137.16,86.36) 62(137.16,88.9) 63(139.7,86.36) 64(139.7,88.9) 65(142.24,86.36) 66(142.24,88.9) 67(144.78,86.36) 68(144.78,88.9)

## Via types
v1: diameter 0.5, hole 0.3, Top Layer to Bottom Layer, tented both sides, 47 vias
v2: diameter 0.54, hole 0.3, Top Layer to Bottom Layer, tented both sides, 35 vias
v3: diameter 0.5, hole 0.3, Top Layer to Bottom Layer, 7 vias
v4: diameter 0.6, hole 0.3, Top Layer to Bottom Layer, tented both sides, 5 vias

## Nets (pads, with @x,y where several pads share a name; then routed paths per layer and width w, separated by ;. In a path a pad name is that pad's centre, name@x,y a point inside that pad or via, vN(x,y) a via of type N, cw(c..) or ccw(c..) an arc to the next point about the centre after c; other vN are vias at no path point)
BOOT: pad.30 R6.1 SW2.2 | length 18.6
  Top Layer w0.125: pad.30 155.055,109.22 SW2.2@155.055,107.441
  Layer 1 w0.15: v2(146.05,103.354) 146.05,101.93 146.482,101.498 151.764,101.498 152.228,101.963 152.895,101.963 154.94,104.008 pad.30
GND: C1.2 C2.2 C3.2 C4.2 C5.2 C6.2 C7.2 C8.2 C9.2 C10.2 C11.2 C12.2 C13.2 C14.2 C15.2 C16.2 C17.2 C18.2 C19.2 C20.2 C21.2 C22.2 C23.2 C24.2 C26.2 C27.2 C28.2 C29.2 C31.2 C32.2 C34.2 C35.2 C36.2 C37.2 J1.1 J1.2 J1.3 J1.4 J1.A1 J1.A12 J1.B1 J1.B12 J2.10 J2.26 J2.44 J2.60 pad.10 pad.33 pad.35 pad.37 pad.60 R1.2 R2.2 R3.2 R10.2 R12.2 SW2.4 SW3.4 U1.81 U2.4 U3.4 U4.2 U5.2 | length 17.7
  Top Layer w0.125: C11.2@139.275,93.647 C7.2@139.275,94.663 ; C28.2@139.275,96.52 C29.2@139.275,97.536 ; C3.2@140.384,92.476 v1(140.175,92.685) 140.175,90.969 140.249,90.895 140.42,90.895 140.833,90.483 U4.2 ; v2(147.066,103.354) C13.2@148.077,103.354 ; R12.2 147.999,103.454 C13.2 ; C23.2@153.403,102.756 v2(153.403,104.37) ; C23.2@153.403,103.01 C23.2@153.543,102.87 ; v1(155.009,90.297) C10.2 ; C18.2@155.263,98.933 C31.2@155.263,99.949 ; v2(155.39,93.472) C16.2 C24.2 C27.2@155.39,96.52
  Bottom Layer w0.125: C20.2 152.793,98.099 153.088,98.394 153.088,98.508 153.289,98.709 ; v2(153.492,100.083) 153.492,98.912 153.289,98.709 ; C19.2 154.141,98.099 153.845,98.394 153.845,98.508 153.644,98.709 153.289,98.709
  other v1: 145.435,93.116 143.84,93.806 149.53,93.806 144.094,100.33 140.157,101.549 141.173,101.549 139.141,101.6 143.002,102.471 144.018,103.371 139.559,104.333 143.002,105.428 144.018,105.428 141.732,112.164 153.01,112.164
  other v2: 145.6,90.272 148.735,90.272 142.806,90.297 139.275,93.706 139.275,96.469 155.365,96.52 139.275,99.238 155.39,99.949 155.39,101.981 151.885,102.514 144.018,103.371 145.034,103.371 151.885,103.53
  other v4: 145.97,95.043 147.32,95.043 148.67,95.043 145.97,96.393 148.67,96.393
GP0: J2.45 pad.44 U1.77 | length 17.6
  Top Layer w0.125: U1.77 144.72,100.517 v3(144.907,100.33)
  Bottom Layer w0.125: pad.44 135.83,108.01 141.014,108.01 142.7,106.324 143.104,106.324 143.535,105.893 143.535,104.392 143.849,104.078 144.018,104.078 144.526,103.57 144.526,102.306 144.907,101.925 v3(144.907,100.33)
GP1: J2.46 pad.45 U1.78 | length 13.1
  Top Layer w0.125: pad.45 137.16,108.959 139.161,106.957 141.428,106.957 142.514,105.871 142.514,102.158 142.711,101.962 144.22,101.962 144.32,101.862 U1.78
GP2: J2.47 pad.46 U1.79 | length 13.6
  Top Layer w0.125: v3(142.342,100.863) 142.443,100.863 142.626,100.68 143.822,100.68 143.92,100.778 U1.79
  Layer 2 w0.125: pad.46 135.755,105.545 137.941,105.545 138.225,105.262 139.499,105.262 140.155,105.262 141.907,103.509 141.907,101.298 v3(142.342,100.863)
GP3: J2.48 pad.47 U1.80 | length 9.7
  Top Layer w0.125: v3(142.93,101.393) 143.03,101.293 U1.80
  Layer 2 w0.125: pad.47 138.328,105.512 140.258,105.512 142.157,103.613 142.157,101.683 142.411,101.429 142.894,101.429 v3(142.93,101.393)
GP4: J2.49 pad.48 U1.1 | length 12.2
  Top Layer w0.125: pad.48 135.408,104.928 137.486,104.928 138.198,104.216 138.198,100.664 138.636,100.225 141.615,100.225 141.647,100.193 U1.1
GP5: J2.50 pad.49 U1.2 | length 8.7
  Top Layer w0.125: pad.49 137.16,103.986 137.948,103.199 137.948,100.535 138.507,99.975 141.512,99.975 141.694,99.793 U1.2
GP6: J2.51 pad.50 U1.3 | length 8.7
  Top Layer w0.125: v3(141.478,99.39) 141.481,99.393 U1.3
  Layer 2 w0.125: pad.50 135.8,100.42 138.063,100.42 138.507,99.975 140.893,99.975 v3(141.478,99.39)
GP7: J2.52 pad.51 U1.4 | length 6.7
  Top Layer w0.125: pad.51 137.317,101.443 137.317,100.812 138.404,99.725 140.524,99.725 141.297,98.953 142.055,98.953 142.095,98.993 U1.4
GP8: J2.53 pad.52 U1.6 | length 8.8
  Top Layer w0.125: v1(138.355,98.996) 138.622,98.73 140.813,98.73 141.09,98.453 141.29,98.453 141.549,98.193 U1.6
  Bottom Layer w0.125: pad.52 135.407,98.272 137.631,98.272 v1(138.355,98.996)
GP9: J2.54 pad.53 U1.7 | length 5.8
  Top Layer w0.125: pad.53 137.74,98.48 140.709,98.48 140.986,98.203 141.186,98.203 141.596,97.793 U1.7
GP10: J2.55 pad.55 U1.8 | length 8.9
  Top Layer w0.125: pad.55 135.942,97.842 138.128,97.842 138.516,98.23 140.605,98.23 140.883,97.953 141.083,97.953 141.642,97.393 U1.8
GP11: J2.56 pad.54 U1.9 | length 6.3
  Top Layer w0.125: pad.54 138.613,97.973 140.509,97.973 140.779,97.703 140.979,97.703 141.689,96.993 U1.9
GP12: J2.57 pad.56 U1.11 | length 8.7
  Top Layer w0.125: pad.56 136.046,93.98 138.02,95.954 141.499,95.954 141.738,96.193 U1.11
GP13: J2.58 pad.57 U1.12 | length 6.1
  Top Layer w0.125: pad.57 137.16,94.108 138.756,95.704 141.673,95.704 141.762,95.793 U1.12
GP14: J2.59 pad.58 U1.13 | length 10
  Top Layer w0.125: pad.58 135.734,91.44 137.948,93.654 137.948,94.542 138.859,95.454 141.725,95.454 141.786,95.393 U1.13
GP15: J2.61 pad.59 U1.14 | length 8.1
  Top Layer w0.125: pad.59 138.198,92.478 138.198,94.439 138.963,95.204 141.599,95.204 141.811,94.993 U1.14
GP16: J2.62 pad.61 U1.16 | length 13
  Top Layer w0.125: v1(141.199,94.513) 141.519,94.193 U1.16
  Layer 2 w0.125: pad.61 138.307,87.507 140.489,87.507 141.202,88.22 141.202,89.357 141.848,90.003 141.848,91.705 141.903,91.759 141.903,93.809 v1(141.199,94.513)
GP17: J2.63 pad.62 U1.17 | length 11.8
  Top Layer w0.125: v1(141.199,93.878) 141.3,93.878 141.385,93.793 U1.17
  Layer 2 w0.125: pad.62 138.303,87.757 140.386,87.757 140.952,88.324 140.952,89.461 141.598,90.107 141.598,91.808 141.636,91.846 141.636,93.441 v1(141.199,93.878)
GP18: J2.64 pad.63 U1.18 | length 13.6
  Top Layer w0.125: v1(141.199,93.243) 141.3,93.243 141.45,93.393 U1.18
  Layer 2 w0.125: pad.63 141.452,88.112 141.452,89.226 142.098,89.872 142.098,91.601 142.153,91.655 142.153,94.178 141.38,94.951 141.017,94.951 140.761,94.695 140.761,93.681 v1(141.199,93.243)
GP19: J2.65 pad.64 U1.19 | length 8.4
  Top Layer w0.125: pad.64 138.813,89.787 138.813,93.022 138.963,93.172 140.488,93.172 140.854,92.806 141.38,92.806 141.567,92.993 U1.19
GP20: J2.66 pad.65 U1.20 | length 7
  Top Layer w0.125: pad.65 142.24,87.786 141.452,88.574 141.452,89.961 141.52,90.029 141.52,91.127 142.42,92.026 U1.20
GP21: J2.67 pad.66 U1.21 | length 4.1
  Top Layer w0.125: pad.66 142.24,89.097 141.834,89.504 141.834,90.83 142.496,91.493 U1.21
GP22: J2.68 pad.67 U1.22 | length 7.5
  Top Layer w0.125: U1.22 143.92,90.938 143.847,90.865 142.574,90.865 142.343,90.634 142.343,89.91 143.028,89.226 143.028,88.112 pad.67
GP23: J2.1 pad.68 U1.23 | length 7.4
  Top Layer w0.125: v1(142.926,92.075) 143.205,92.354 144.094,92.354 144.32,92.129 U1.23
  Layer 2 w0.125: v1(142.926,92.075) 142.348,91.498 142.348,90.107 143.556,88.9 pad.68
GP24: J2.2 pad.1 U1.25 | length 7.6
  Top Layer w0.125: U1.25 145.12,90.945 144.887,90.713 144.887,90.121 143.992,89.226 143.992,88.574 144.454,88.112 145.568,88.112 pad.1
GP25: J2.3 pad.2 U1.26 | length 4.3
  Top Layer w0.125: U1.26 145.515,91.488 145.515,90.987 145.137,90.609 145.137,89.934 145.288,89.784 146.436,89.784 pad.2
GP26: J2.4 pad.3 U1.27 | length 13.8
  Top Layer w0.125: U1.27 145.92,92.106 146.982,93.167 150.564,93.167 150.818,93.421 v1(150.825,93.421)
  Layer 2 w0.125: pad.3 150.704,87.204 150.704,89.588 151.136,90.019 151.136,92.866 150.887,93.114 150.887,93.359 v1(150.825,93.421)
GP27: J2.5 pad.4 U1.28 | length 9.4
  Top Layer w0.125: U1.28 146.32,92.105 146.95,92.735 150.647,92.735 v1(150.698,92.685)
  Layer 2 w0.125: pad.4 149.86,89.097 150.698,89.936 v1(150.698,92.685)
GP28: J2.6 pad.5 U1.36 | length 6.3
  Top Layer w0.125: U1.36 149.52,90.895 151.13,89.285 151.13,88.544 152.4,87.274 pad.5
GP29: J2.7 pad.6 U1.37 | length 3.9
  Top Layer w0.125: U1.37 149.92,90.849 151.204,89.564 151.736,89.564 pad.6
GP30: J2.8 pad.7 U1.38 | length 7.9
  Top Layer w0.125: U1.38 150.32,90.802 151.308,89.814 152.73,89.814 154.94,87.605 pad.7
GP31: J2.9 pad.8 U1.39 | length 5.7
  Top Layer w0.125: U1.39 150.72,90.758 151.409,90.068 152.832,90.068 154,88.9 pad.8
GP32: J2.11 pad.9 U1.40 | length 9.3
  Top Layer w0.125: U1.40 151.763,91.493 153.467,89.789 155.424,89.789 157.48,87.733 pad.9
GP33: J2.12 pad.11 U1.42 | length 8.9
  Top Layer w0.125: v1(151.79,91.973) 151.371,92.393 151.371,92.598 151.38,92.606 151.38,92.782 151.591,92.993 U1.42
  Layer 2 w0.125: v1(151.79,91.973) 154.407,91.973 pad.11
GP34: J2.13 pad.12 U1.43 | length 9.6
  Top Layer w0.125: U1.43 152.833,93.393 153.014,93.212 153.014,92.67 153.883,91.801 155.321,91.801 156.469,90.652 159.232,90.652 pad.12
GP35: J2.14 pad.13 U1.44 | length 6.5
  Top Layer w0.125: U1.44 152.833,93.793 153.268,93.358 153.268,92.834 154.051,92.051 156.869,92.051 pad.13
GP36: J2.15 pad.14 U1.45 | length 9.6
  Top Layer w0.125: U1.45 152.833,94.193 153.518,93.508 153.518,92.937 154.097,92.358 158.398,92.358 pad.14
GP37: J2.16 pad.15 U1.46 | length 6.9
  Top Layer w0.125: U1.46 152.833,94.593 153.768,93.658 153.768,93.041 154.074,92.734 156.234,92.734 pad.15
GP38: J2.17 pad.16 U1.47 | length 10.8
  Top Layer w0.125: U1.47 152.832,94.993 154.018,93.808 154.018,93.144 154.178,92.984 155.702,92.984 156.159,93.441 156.159,93.929 158.75,96.52 pad.16
GP39: J2.18 pad.17 U1.48 | length 6.8
  Top Layer w0.125: U1.48 153.197,95.393 v1(153.568,95.021)
  Layer 2 w0.125: v1(153.568,95.021) 154.032,95.485 154.032,95.892 155.245,97.104 156.697,97.104 157.281,96.52 pad.17
GP40: J2.19 pad.18 U1.49 | length 9.2
  Top Layer w0.125: U1.49 153.559,95.793 v1(153.568,95.783)
  Layer 2 w0.125: v1(153.568,95.783) 155.15,97.365 158.325,97.365 pad.18
GP41: J2.20 pad.19 U1.52 | length 6.9
  Top Layer w0.125: U1.52 154.163,96.993 154.178,97.008 156.698,97.008 157.48,97.79 pad.19
GP42: J2.21 pad.20 U1.53 | length 10.8
  Top Layer w0.125: U1.53 156.397,97.393 v1(156.82,97.815)
  Layer 2 w0.125: v1(156.82,97.815) 158.394,97.815 159.232,98.653 159.232,99.699 160.02,100.486 pad.20
GP43: J2.22 pad.21 U1.54 | length 8.3
  Top Layer w0.125: U1.54 153.769,97.793 153.867,97.695 156.013,97.695 156.644,98.326 156.644,100.764 pad.21
GP44: J2.23 pad.22 U1.55 | length 12.3
  Top Layer w0.125: U1.55 153.723,98.193 153.971,97.945 155.91,97.945 156.394,98.43 156.394,101.627 158.906,104.14 pad.22
GP45: J2.24 pad.23 U1.56 | length 10.4
  Top Layer w0.125: U1.56 153.677,98.593 154.074,98.195 155.806,98.195 156.144,98.533 156.144,102.777 157.48,104.113 pad.23
GP46: J2.25 pad.24 U1.57 | length 14.5
  Top Layer w0.125: U1.57 153.63,98.993 154.178,98.445 155.702,98.445 155.853,98.596 155.853,102.84 156.337,103.324 156.337,104.37 158.647,106.68 pad.24
GP47: J2.28 pad.25 R7.1 U1.58 | length 18.2
  Top Layer w0.15: R7.1 147.999,105.487 148.474,105.012 148.474,104.284 148.679,104.079 151.373,104.079 151.74,104.445 151.828,104.445 151.867,104.406 v3@151.94,104.479 ; v3@151.926,104.487 v3(151.867,104.546) 154,106.68 pad.25 ; v3(152.095,101.194) 151.482,100.581 151.482,99.481 151.57,99.393 U1.58
  Layer 2 w0.15: v3(151.867,104.546) 151.867,104.213 152.355,103.725 152.355,102.32 152.095,102.06 v3(152.095,101.194)
NetC18_1: C18.1 C31.1 R16.1 U1.59 | length 4.7
  Top Layer w0.125: U1.59 152.785,99.793 153.098,99.48 153.555,99.48 154.101,98.934 154.364,98.934 154.49,99.06 154.49,99.822 154.363,99.949 154.49,100.076 154.49,100.838 R16.1@154.363,100.965
NetC30_1: C30.1 L1.1 U2.5 | length 3.5
  Bottom Layer w0.5: U2.5 139.052,105.265 139.837,105.265 140.184,104.918 140.184,104.074 140.157,104.047 L1.1
  other v1: 140.099,102.789
NetC30_2: C30.2 U2.6 | length 3.8
  Top Layer w0.15: v1(139.034,106.212) 138.662,105.84 138.662,103.306 138.974,102.993 138.999,102.993 139.199,102.793 C30.2
NetJ1_A5: J1.A5 R2.1 | length 6.7
  Top Layer w0.125: J1.A5 149.316,107.821 150.391,107.821 151.007,108.438 151.007,109.307 152.985,111.285 R2.1
NetJ1_B5: J1.B5 R3.1 | length 6
  Top Layer w0.125: R3.1 141.754,111.285 141.966,111.073 141.966,111.051 142.977,110.04 145.23,110.04 146.045,109.225 J1.B5
NetR7_2: R7.2 R12.1 | length 1
  Top Layer w0.15: R12.1 R7.2
P1V1: C24.1 C26.1 C27.1 C28.1 C29.1 C37.1 U1.10 U1.32 U1.51 U5.5 | length 34.3
  Top Layer w0.125: C28.1@140.175,96.52 140.175,97.536 140.592,97.536 140.675,97.453 140.876,97.453 141.735,96.593 U1.10 ; C26.1@147.92,90.272 U1.32 ; U1.51 154.417,96.593 154.49,96.52 C24.1
  Layer 1 w0.125: v2(140.175,96.469) 143.68,96.469 147.42,92.729 ; v2(147.835,90.272) 147.835,92.336 147.028,92.336 147.42,92.729 ; v2(154.49,95.479) 154.49,94.609 154.191,94.31 151.527,94.31 151.425,94.208 150.668,94.208 150.566,94.31 148.539,94.31 148.412,94.183 148.412,93.72 147.42,92.729
  Bottom Layer w0.125: v2(147.835,90.272) 149.057,91.493 149.457,91.493 149.53,91.566 C37.1 149.27,92.166 U5.5
P3V3: C3.1 C6.1 C7.1 C8.1 C9.1 C10.1 C11.1 C12.1 C13.1 C14.1 C15.1 C16.1 C17.1 C19.1 C20.1 C32.1 C34.1 C35.1 C36.1 pad.43 R8.2 R9.2 R11.1 R16.2 U1.5 U1.15 U1.24 U1.29 U1.41 U1.50 U1.60 U1.68 U1.69 U1.76 U3.8 U4.1 U4.4 U5.1 U5.3 | length 43.2
  Top Layer w0.125: v1(139.275,92.685) 139.457,92.503 U4.1@139.457,90.483 ; C11.1@140.175,93.669 C11.1 C11.1@140.175,93.722 ; C7.1@140.175,94.663 C11.1@140.175,93.722 ; C7.1@140.175,94.722 140.788,94.722 141.017,94.951 141.38,94.951 141.738,94.593 U1.15 ; C6.1@140.294,99.331 140.387,99.238 140.658,99.238 141.193,98.703 141.404,98.703 141.513,98.593 U1.5 ; C11.1@140.387,93.934 C11.1@140.175,93.722 ; v2(143.703,90.287) 144.108,90.287 144.72,90.899 U1.24 ; v1(144.018,102.471) C14.1 145.12,102.385 U1.76 ; v2(146.5,90.272) 146.5,90.3 146.72,90.52 U1.29 ; C12.1@147.066,102.454 C13.1@147.92,102.454 ; U1.69 C13.1@147.92,102.291 ; C13.1@148.082,102.454 148.32,102.454 U1.68 ; U1.41 152.22,92.163 152.228,92.155 152.228,92.044 152.959,91.313 C10.1 ; U1.50 153.359,96.193 153.387,96.221 153.75,96.221 154.006,95.965 154.006,95.803 154.027,95.782 154.027,94.951 154.256,94.722 154.278,94.722 154.49,94.51 C16.1 v2(154.49,93.472) ; U1.60 152.22,100.481 152.723,100.983 C15.1@153.365,100.983 ; C15.1 C15.1@153.365,100.983 ; v1(154.109,90.297) C10.1@154.109,91.262 ; C32.1@154.363,101.981 154.363,101.829 153.517,100.983 C15.1@153.365,100.983 ; C32.1@154.363,102.003 154.487,102.003 155.181,102.697 155.181,102.915 R11.1@155.263,102.997 ; v2(154.49,101.981) C32.1@154.49,102.003
  Bottom Layer w0.125: C35.1 144.1,92.166 U5.1 146.218,92.166 146.558,92.507 146.558,93.904 146.395,94.066 U5.3 ; U3.8 152.48,96.52 C20.1 C19.1 154.368,96.719 154.663,96.424 154.663,96.31 155.169,95.805 155.169,94.151 v2(154.49,93.472)
  other v1: 143.84,92.866 149.022,104.554 146.05,105.428
  other v2: 140.175,93.706 140.175,99.238 155.39,100.965 144.018,102.471 147.066,102.471
P3V3OUT: C4.1 C5.1 C21.1 L1.2 pad.41 U2.1 | length 18.5
  Top Layer w0.15: C5.1@141.188,100.711 141.398,100.921 141.398,100.936 142.252,101.79 142.252,105.515 v3(141.534,106.233)
  Layer 1 w0.5: v1(139.141,100.711) 138.647,100.711 138.354,101.004 138.354,110.414 pad.41
  other v1: 140.157,100.721 141.173,100.711
P_N: J1.A7 J1.B7 R1.1 R4.1 | length 9.9
  Top Layer w0.125: R4.1 v2(150.985,102.489)
  Top Layer w0.15: J1.A7 J1.B7
  Bottom Layer w0.15: J1.A7 146.895,107.065 147.197,106.762 147.197,104.839 147.197,104.585 148.933,102.849 149.187,102.849 150.625,102.849 v2(150.985,102.489)
P_P: J1.A6 J1.B6 R5.1 R10.1 | length 9.4
  Top Layer w0.125: R5.1 v2(150.985,103.53)
  Bottom Layer w0.15: J1.B6 J1.A6 147.745,107.035 147.472,106.762 147.472,104.699 149.047,103.124 150.578,103.124 v2(150.985,103.53)
QCLK: U1.71 U3.6 | length 5.6
  Top Layer w0.15: U1.71 147.12,100.585 147.22,100.485 147.22,99.697 v2(147.218,99.695)
  Bottom Layer w0.15: v2(147.218,99.695) 148.464,99.695 149.099,99.06 U3.6
QSD0: U1.72 U3.5 | length 5.1
  Top Layer w0.15: v2(146.71,100.33) 146.72,100.34 U1.72
  Bottom Layer w0.15: v2(146.71,100.33) U3.5
QSD1: U1.74 U3.2 | length 5.3
  Top Layer w0.15: v1(145.212,97.79) 145.212,99.072 145.92,99.78 U1.74
  Bottom Layer w0.15: U3.2 v1(145.212,97.79)
QSD2: U1.73 U3.3 | length 4.5
  Top Layer w0.15: v1(145.847,99.06) 146.195,99.408 146.195,100.479 146.32,100.604 U1.73
  Bottom Layer w0.15: U3.3 v1(145.847,99.06)
QSD3: U1.70 U3.7 | length 6.2
  Top Layer w0.15: U1.70 147.52,100.058 147.93,99.648 v2(147.93,98.603)
  Bottom Layer w0.15: v2(147.93,98.603) 149.651,98.603 150.464,97.79 U3.7
QSS: R6.2 R8.1 U1.75 U3.1 | length 9.1
  Top Layer w0.15: v1(144.464,96.52) 144.464,98.713 145.52,99.769 U1.75 145.52,101.934 145.872,102.286 R6.2@145.872,102.543 ; R6.2 146.075,102.471 146.275,102.671 146.275,102.696 146.558,102.979 146.558,104.02 146.275,104.303 146.275,104.328 146.075,104.528 R8.1
RST: pad.42 R9.1 SW3.2 U1.35 | length 39.4
  Top Layer w0.125: pad.42 139.728,109.192 140.821,109.192 141.197,108.816 141.197,107.76 SW3.2 141.657,107.3 141.657,107.133 142.745,106.045 148.43,106.045 148.788,105.687 148.788,105.666 149,105.454 v1(149.022,105.454) ; U1.35 149.12,90.885 149.396,90.608 149.396,90.304 v1(149.428,90.272)
  Bottom Layer w0.125: v1(149.022,105.454) 154.896,105.454 156.134,104.216 156.134,93.32 153.086,90.272 v1(149.428,90.272)
U_N: R4.2 U1.66 | length 1.2
  Top Layer w0.15: U1.66 R4.2@149.12,102.515 ; R4.2@149.129,102.522 R4.2@149.136,102.515
U_P: R5.2 U1.67 | length 2.4
  Top Layer w0.15: U1.67 148.72,101.902 148.615,102.006 148.615,103.015 148.906,103.305 R5.2@149.055,103.454
VBUS: J1.A4 J1.A9 J1.B4 J1.B9 pad.27 | length 21.8
  Bottom Layer w0.5: J1.A9 J1.B4 145.195,109.127 145.898,109.83 148.979,109.83 149.445,109.364 J1.B9 J1.A4 149.474,107.071 149.474,106.685 149.962,106.197 155.016,106.197 156.185,107.366 156.185,110.465 pad.27
VRA: C23.1 R11.2 U1.61 U1.64 | length 6.2
  Top Layer w0.125: U1.64 149.921,101.803 150.023,101.906 151.028,101.906 151.12,101.813 U1.61 151.356,101.293 152.026,101.963 C23.1 ; C23.1@153.581,102.027 154.281,102.727 154.281,102.76 154.34,102.818 R11.2@154.489,102.818
VSYS: C1.1 C2.1 C22.1 pad.29 U2.2 U2.3 | length 22.2
  Top Layer w0.5: v1(143.002,103.371) C1.1 v1(144.018,104.528)
  Layer 1 w0.5: v1(144.018,104.528) 146.565,104.528 148.234,106.197 152.679,106.197 153.441,106.959 153.441,110.261 pad.29
  Bottom Layer w0.15: U2.2 142.322,105.283 142.527,105.078 142.527,104.515 142.709,104.333
  Bottom Layer w0.5: U2.3 142.709,104.333 143.002,104.04 v1(143.002,103.371)
XIN: U1.30 U4.3 | length 8.2
  Top Layer w0.15: U4.3@140.857,91.483 v1(140.883,91.483) ; U1.30 147.12,90.319 v1(147.168,90.272)
  Bottom Layer w0.15: v1(140.883,91.483) 140.95,91.416 140.95,91.232 141.183,90.999 146.542,90.999 147.033,90.508 147.033,90.501 147.168,90.366 v1(147.168,90.272)
pads on no net: D2.1 D2.2 J1.A8 J1.B8 J2.27 J2.29 J2.30 J2.41 J2.42 J2.43 SW2.1 SW2.3 SW3.1 SW3.3 U1.31 U1.33 U1.34 U1.62 U1.63 U1.65 U5.4

## Polygon pours and split planes (outlines as drawn)
P3V3 on Layer 2 "NONET_L03_P002" (solid, shelved, pour order 2): 133.35,113.03 133.35,85.09 161.29,85.09 161.29,113.03
GND on Layer 2 "NONET_L03_P000" (solid, shelved, pour order 0): 151.885,103.53 151.859,103.505 151.859,102.489 151.275,101.905 149.377,101.905 146.634,104.648 146.634,106.172 146.416,106.39 145.055,106.39 144.345,107.1 144.345,109.014 144.729,109.398 149.758,109.398 150.295,108.861 150.295,107.1 149.596,106.401 148.209,106.401 147.999,106.19 147.999,104.759 148.927,103.83 149.779,103.83 150.14,104.191 151.224,104.191
GND on Layer 1 "NONET_L02_P001" (solid, shelved, pour order 1): 133.35,85.09 161.29,85.09 161.29,113.03 133.35,113.03

## Keep-outs
Keep-Out Layer:
  the board outline again, w0.4

## Silkscreen, mask and mechanical layers (free items; w line width, h text height)
Top Overlay:
  text "PWR3" at 138.106,113.289 h1 r180
  text "BOOT" at 140.626,113.289 h1 r180
  text "SEL" at 155.482,113.289 h1 r180
  text "PWR3" at 158.426,113.289 h1 r180
  text "GND" at 144.043,112.771 h1
  text "GND" at 146.583,112.771 h1
  text "GND" at 149.123,112.771 h1
  text "PWR3" at 153.411,110.166 h1 r270
  text "GP0" at 133.609,108.575 h1 r90
  text "GP0" at 136.149,108.575 h1 r90
  text "GP0" at 156.469,108.575 h1 r90
  text "GP0" at 159.009,108.575 h1 r90
  text "PWR3" at 138.754,107.691 h1
  text "GP0" at 133.609,106.035 h1 r90
  text "GP0" at 136.149,106.035 h1 r90
  text "GP0" at 156.469,106.035 h1 r90
  text "GP0" at 159.009,106.035 h1 r90
  text "GP0" at 133.609,103.495 h1 r90
  text "GP0" at 136.149,103.495 h1 r90
  text "GP0" at 156.469,103.495 h1 r90
  text "GP0" at 159.009,103.495 h1 r90
  text "GP0" at 133.609,100.955 h1 r90
  text "GP0" at 136.149,100.955 h1 r90
  text "GP0" at 156.469,100.955 h1 r90
  text "GP0" at 159.009,100.955 h1 r90
  text "GP0" at 133.609,98.415 h1 r90
  text "GP0" at 136.149,98.415 h1 r90
  text "GP0" at 156.469,98.415 h1 r90
  text "GP0" at 159.009,98.415 h1 r90
  text "GP0" at 133.609,95.875 h1 r90
  text "GP0" at 136.149,95.875 h1 r90
  text "GP0" at 156.469,95.875 h1 r90
  text "GP0" at 159.009,95.875 h1 r90
  text "GP0" at 133.609,93.335 h1 r90
  text "GP0" at 136.149,93.335 h1 r90
  text "GP0" at 156.469,93.335 h1 r90
  text "GP0" at 159.009,93.335 h1 r90
  text "PLCC2350B" at 153.641,92.01 h1.5 r90
  text "GP0" at 133.609,90.795 h1 r90
  text "GP0" at 136.149,90.795 h1 r90
  text "GP0" at 156.469,90.795 h1 r90
  text "GP0" at 159.009,90.795 h1 r90
  text "23" at 143.809,88.381 h0.7 r90
  text "GND" at 133.883,87.371 h1
  text "GP0" at 136.515,87.371 h1
  text "GP0" at 139.055,87.371 h1
  text "GP0" at 141.595,87.371 h1
  text "GND" at 146.583,87.371 h1
  text "GP0" at 149.215,87.371 h1
  text "GP0" at 151.755,87.371 h1
  text "GP0" at 154.295,87.371 h1
  text "GP0" at 156.835,87.371 h1
  text "GND" at 159.283,87.371 h1
  text "22" at 143.835,85.815 h0.7 r90
  text "GP0" at 136.515,84.831 h1
  text "GP0" at 139.055,84.831 h1
  text "GP0" at 141.595,84.831 h1
  text "PWR3" at 146.374,84.831 h1
  text "GP0" at 149.215,84.831 h1
  text "GP0" at 151.755,84.831 h1
  text "GP0" at 154.295,84.831 h1
  text "GP0" at 156.835,84.831 h1
Mechanical 15:
  lines w0.05: 133.35,86.995 133.35,111.125 135.255,113.03 159.385,113.03 161.29,111.125 161.29,88.9 161.29,86.995 159.385,85.09 135.255,85.09 133.35,86.995

## Text inside footprints (layer, text, board x,y; h text height)
D2: Top Assembly "K" at 166.923,86.722 h0.5
LOGO1: Top Overlay "0" at 176.585,132.944 h5 r270; Top Overlay "PUBLIC / DOMAIN" at 176.135,129.803 h2.5 r270
SW2: Top Assembly "1" at 155.478,103.795 h1 r90
SW3: Top Assembly "1" at 141.762,103.795 h1 r90
U2: Bottom Assembly "1" at 142.059,105.908 h0.3
U3: Bottom Assembly "1" at 143.014,96.82 h0.3 r180
U4: Top Assembly "1" at 138.983,89.983 h1
U5: Bottom Assembly "1" at 144.91,92.491 h0.3 r180